# Altium PCB Webbie-V3.0.PcbDoc (part 1 of 3)
Units mil, origin at the board's own origin, x right, y up, seen from the top; angles counter-clockwise.
Board outline 3937.01 x 1574.8 mil, 2 copper layers (Top Layer, Bottom Layer), stack 62.8 mil thick; 134 components, 93 nets, 484 pads, 190 vias.
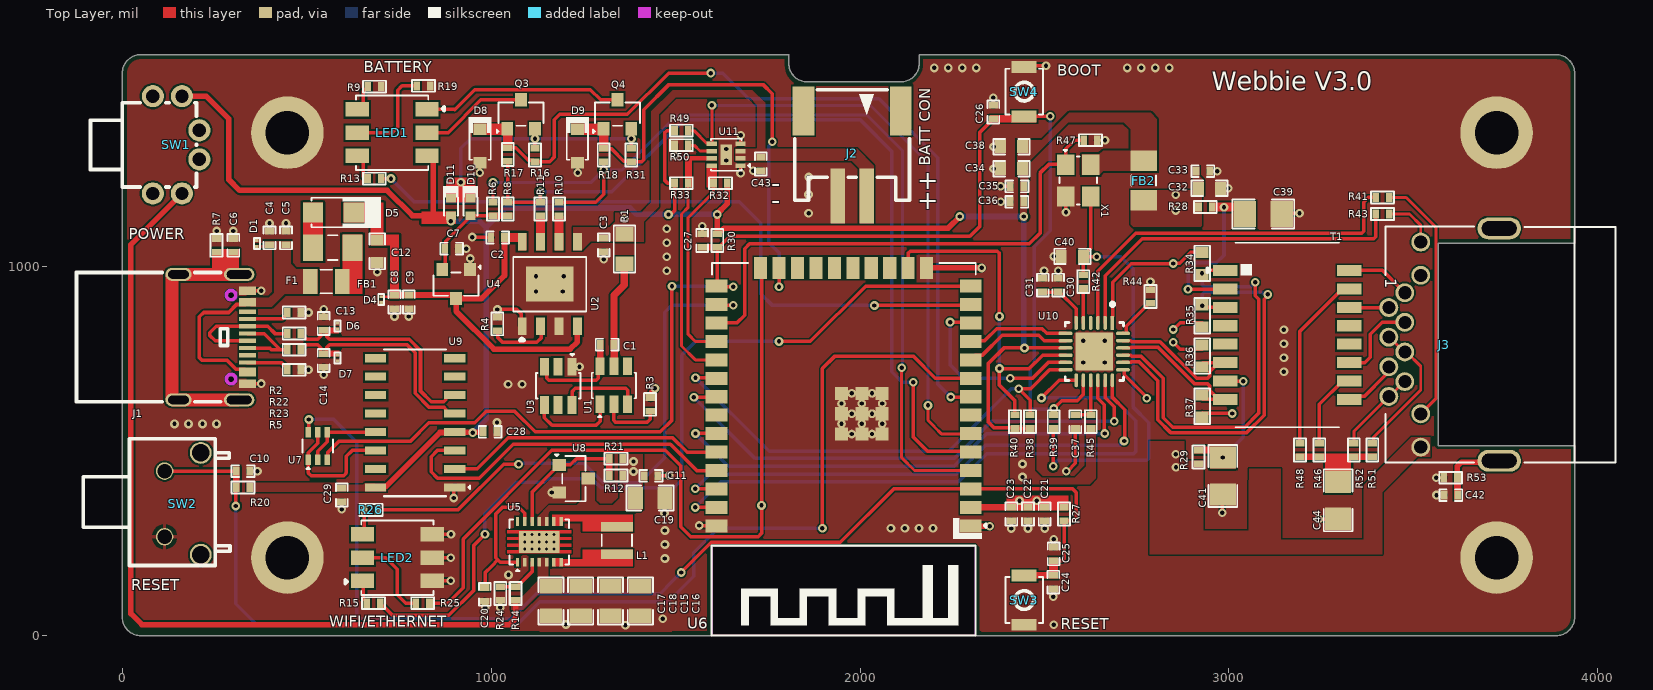
[diagram p0: Top Layer view]
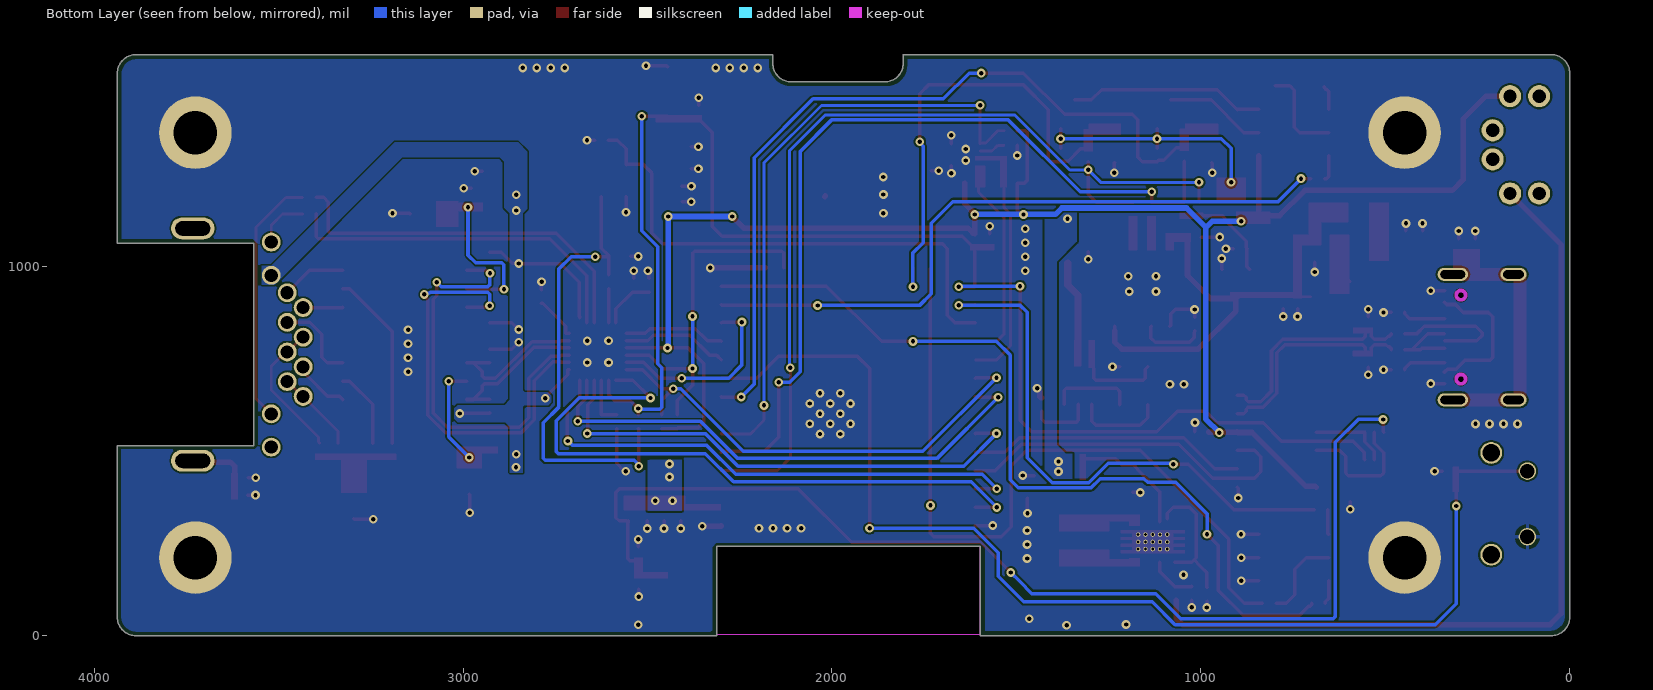
[diagram p1: Bottom Layer view, seen from below]
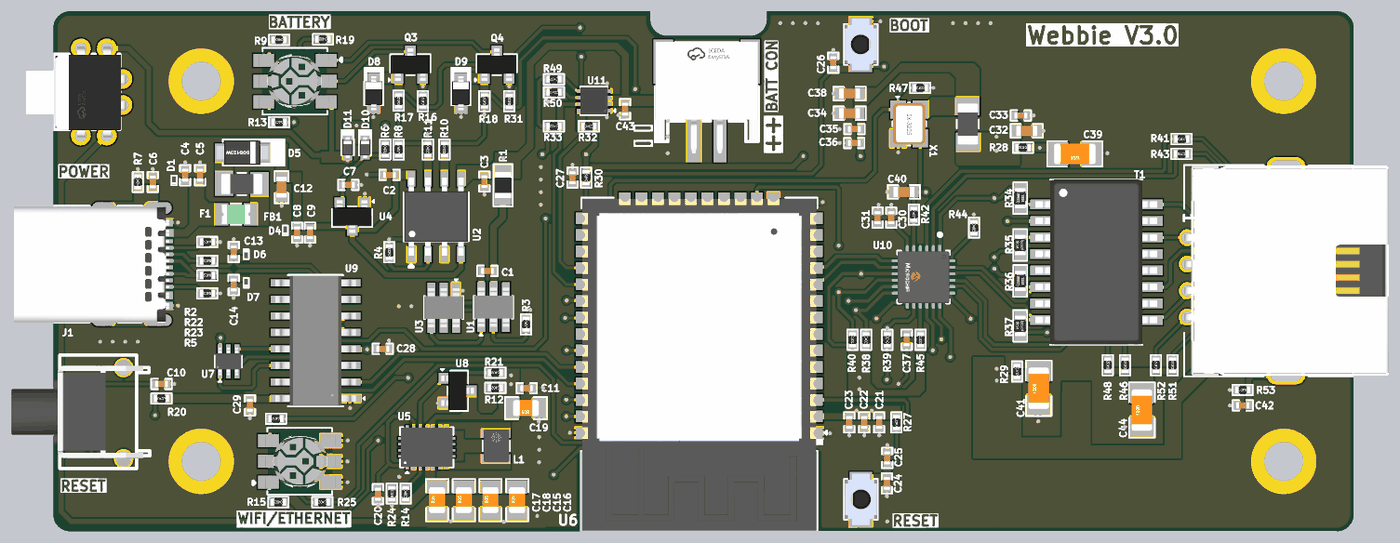
[diagram p3: 3D render of the assembled board from above, using the file's embedded part models]

## Layer stack, top to bottom
Top Solder: solder mask 0.4, Solder Resist, Dk 3.5
Top Layer: signal copper 1.4
Dielectric 1: dielectric 60, FR-4, Dk 4.8
Bottom Layer: signal copper 1.4
Bottom Solder: solder mask 0.4, Solder Resist, Dk 3.5

## Board outline
50,0 1597.76,0 1597.76,242.23 2311.67,242.23 2311.67,0.22 3887.01,0.22 3887.01,0 ccw(c3887.01,50) 3937.01,50 3937.01,514.1 3568,514.1 3568,1064 3937.01,1064 3937.01,1524.8 ccw(c3887.01,1524.8) 3887.01,1574.8 3817.37,1574.8 2160.39,1574.8 2160.39,1551 cw(c2110.39,1551) 2110.39,1501 1857.1,1501 cw(c1857.1,1551) 1807.1,1551 1807.1,1574.78 ccw(c1807.08,1574.78) 1807.08,1574.8 50,1574.8 ccw(c50,1524.8) 0,1524.8 0,50 ccw(c50,50)

## Design rules (kind name [scope] priority, off if disabled: settings)
Clearance [All] p1: gap=5 ignorepadtopadclearanceinfootprint=TRUE except(0: Arc-Text Track-Text SMDPad-Text THPad-Text Via-Text Fill-Text Poly-Text Region-Text Text-Text Text-Hole; 7: Arc-Hole Track-Hole SMDPad-Hole THPad-Hole Via-Hole)
DiffPairsRouting [All] p1: maxlimit=5 minlimit=5 mostfreqgap=5 toplayer_minwidth=9.5 toplayer_maxwidth=9.5 toplayer_prefwidth=9.5 bottomlayer_minwidth=9.5 bottomlayer_maxwidth=9.5 bottomlayer_prefwidth=9.5 maxuncoupledlength=500
HoleSize [All] p1: absolutevalues=TRUE maxlimit=500 minlimit=1 maxpercent=80.000 minpercent=20.000
HoleToHoleClearance [All] p1: gap=7 allowstackedmicrovias=TRUE
MatchedLengths "Schematic Matched Net Lengths_3" [InNetClass('EtherCAT_A')] p1: tolerance=20 checknetsindiffpair=FALSE checkdiffpairvsdiffpair=TRUE checkxsignals=TRUE checkothers=TRUE
MatchedLengths "Schematic Matched Net Lengths_2" [InNetClass('USB 90 OHM')] p2: tolerance=50 checknetsindiffpair=FALSE checkdiffpairvsdiffpair=TRUE checkxsignals=TRUE checkothers=TRUE
MaxMinImpedance "Schematic Impedance Constraint_2" [InNetClass('USB 90 OHM')] p1: minimum=85.00 maximum=95.00
MaxMinImpedance "Schematic Impedance Constraint_1" [InNetClass('EtherCAT_A')] p2: minimum=95.00 maximum=105.0
MinimumSolderMaskSliver [All] p1: minsoldermaskwidth=0
PolygonConnect [All] p1: connectstyle=Direct reliefconductorwidth=10 reliefentries=4 polygonreliefangle="90 Angle" airgapwidth=10
RoutingVias [All] p1: holewidth=11.81 width=23.62 viastyle="Through Hole" minholewidth=11.81 minwidth=23.62 maxholewidth=11.81 maxwidth=23.62
SilkToSilkClearance [All] p1: silktosilkclearance=0
SilkToSolderMaskClearance [IsPad] p1: minsilkscreentomaskgap=0 clearancetoexposedcopper=TRUE
SolderMaskExpansion [All] p1: expansion=4 istentingtop=FALSE
SupplyNets "Schematic Supply Nets_9" [InNet('+3V3')] p1: voltage=0.000
SupplyNets "Schematic Supply Nets_8" [InNet('OR_3.3V')] p2: voltage=0.000
SupplyNets "Schematic Supply Nets_7" [InNet('+3.3V_IN')] p3: voltage=0.000
SupplyNets "Schematic Supply Nets_6" [InNet('+5V_OUT')] p4: voltage=0.000
SupplyNets "Schematic Supply Nets_5" [InNet('AVDD')] p5: voltage=0.000
SupplyNets "Schematic Supply Nets_4" [InNet('B-')] p6: voltage=0.000
SupplyNets "Schematic Supply Nets_3" [InNet('OUT/BATT+')] p7: voltage=0.000
SupplyNets "Schematic Supply Nets_2" [InNet('GND')] p8: voltage=0.000
SupplyNets "Schematic Supply Nets_1" [InNet('VUSB')] p9: voltage=0.000
SupplyNets "Schematic Supply Nets" [InNet('+3.3_OUT')] p10: voltage=0.000
UnRoutedNet [All] p1: checkbadconnections=TRUE
Width [All] p1: maxlimit=50 minlimit=5 preferedwidth=10
23 further rules are at their usual default settings.

## Classes and differential pairs
differential pair class USB_Lines: USB
differential pair class "ETHERNET 100 OHM": ETH2X_RX ETH2X_TX
net class "USB 90 OHM": USB_N USB_P
net class EtherCAT_A: ETH2X_RX_N ETH2X_RX_P ETH2X_TX_N ETH2X_TX_P
component class Power_Sheet: C1 C2 C3 C4 C5 C6 C7 C8 C9 C11 C12 C13 C14 C15 C16 C17 C18 C19 C20 D1 D4 D5 D8 D9 D10 D11 F1 FB1 J1 J2 L1 LED1 LED2 Q3 Q4 R1 R2 R3 R4 R5 R6 R7 R8 R9 R10 R11 R12 R13 R14 R15 R16 R17 R18 R19 R21 R22 R23 R24 R25 R26 R31 SW1 U1 U2 U3 U4 U5 U8
component class FuelGauge_Sheet: C43 R32 R33 R49 R50 U11
component class Ethernet_Sheet: C30 C31 C32 C33 C34 C35 C36 C37 C38 C39 C40 C41 C42 C44 FB2 J3 R28 R29 R34 R35 R36 R37 R38 R39 R40 R41 R42 R43 R44 R45 R46 R47 R48 R51 R52 R53 T1 U10 X1
component class Controller_Sheet: C10 C21 C22 C23 C24 C25 C26 C27 C28 C29 D6 D7 R20 R27 R30 SW2 SW3 SW4 U6 U7 U9
differential pair USB: +USB_P -USB_N
differential pair ETH2X_TX: +ETH2X_TX_P -ETH2X_TX_N
differential pair ETH2X_RX: +ETH2X_RX_P -ETH2X_RX_N

## Components (designator, comment, footprint, x,y, rotation, side; value= is the part's Value field where it differs from the comment)
C1 "100nF" cap-0402 1314.51,788.65 r180 top
C2 "100nF" cap-0402 1017.69,1079.32 r180 top
C3 "10uF" Cap-0402 1305.3,1059.06 r90 top
C4 "10nF" Cap-0402 399,1078.5 r90 top
C5 "10nF" Cap-0402 444,1078.5 r90 top
C6 "4.7nF" Cap-0402 301,1058 r270 top
C7 "1uF" Cap-0402 893.12,1048.97 r180 top
C8 "10nF" Cap-0402 737.98,904.17 r270 top
C9 "100nF" cap-0402 776.98,904.17 r270 top
C10 "100nF" cap-0402 327.43,446 r0 top
C11 "100nF" cap-0402 1433.07,433.03 r0 top
C12 "10uF" Cap-0603 691,1042 r90 top
C13 "47pF" Cap-0402 546.01,846 r270 top
C14 "47pF" Cap-0402 546.01,746 r90 top
C15 "22uF" Cap-0805 1323.55,94 r90 top
C16 "22uF" Cap-0805 1404.32,94.01 r90 top
C17 "22uF" Cap-0805 1162,93.99 r90 top
C18 "22uF" Cap-0805 1242.77,93.99 r90 top
C19 "22uF" Cap-0805 1431,373 r180 top
C20 "100nF" cap-0402 982.77,112.09 r270 top
C21 "10nF" Cap-0402 2500.48,329.46 r90 top
C22 "100nF" cap-0402 2455.22,329.46 r90 top
C23 "100nF" cap-0402 2409.97,329.46 r90 top
C24 "100nF" cap-0402 2523.86,144.9 r270 top
C25 "100nF" cap-0402 2524.86,221.9 r270 top
C26 "100nF" cap-0402 2361.47,1419.28 r90 top
C27 "100nF" cap-0402 1572,1071 r270 top
C28 "10nF" Cap-0402 997.4,552.43 r0 top
C29 "100nF" cap-0402 595.21,381.31 r270 top
C30 "1uF" Cap-0402 2537,950 r270 top
C31 "4.7nF" Cap-0402 2495.56,950 r90 top
C32 "10uF" Cap-0603 2947.37,1212.61 r180 top
C33 "100nF" cap-0402 2929.37,1259.22 r0 top
C34 "10uF" Cap-0603 2411,1266 r0 top
C35 "100nF" cap-0402 2425.32,1218 r180 top
C36 "100nF" cap-0402 2425,1176 r180 top
C37 "100nF" cap-0402 2583.82,579.91 r90 top
C38 "10uF" Cap-0603 2411,1325.55 r0 top
C39 "1000pF" Cap-1206 3093,1143 r180 top
C40 "15pF" Cap-0603 2575.34,1027.98 r0 top
C41 "1000pF" Cap-1206 2983.5,433 r90 top
C42 "4.7nF" Cap-0402 3601.5,381 r180 top
C43 "100nF" cap-0402 1731.2,1278.62 r270 top
C44 "1000pF" Cap-1206 3296,367 r90 top
D1 "PESD5V0H1BSFYL" DSN0603-2 365.24,1062.81 r90 top
D4 "PESD5V0H1BSFYL" DSN0603-2 702,910.87 r90 top
D5 "PMEG3010ER,115" SOD-123W 572,1147 r0 top
D6 "PESD5V0H1BSFYL" DSN0603-2 583.47,839.1 r270 top
D7 "PESD5V0H1BSFYL" DSN0603-2 583.62,752.63 r90 top
D8 "MM3Z3V3" SOD-323 970,1327 r270 top
D9 "MM3Z3V3" SOD-323 1234,1327 r270 top
D10 "RB521S-30" SOD-523 943.78,1162.18 r90 top
D11 "RB521S-30" SOD-523 891,1162.18 r90 top
F1 "BSMD0805L-200" Fuse-0805 553,960 r0 top
FB1 "100MHz" IND-1206 570.62,1051.99 r180 top
FB2 "100MHz" IND-1206 2769,1233.61 r90 top
J1 "MC-121-L119" MC-121-L119 317.04,979.25 r270 top locked
J2 "S2B-PH-SM4-TB(LF)(SN)" S2B-PH-SM4-TB(LF)(SN) 1846.74,1422.32 r180 top locked
J3 "RC01835" RC01835 3583,789 r270 top locked
L1 "1uH" "IND-1008 (2520 Metric)" 1340.78,258.35 r270 top
LED1 "MHP5050RGBDT" MHP5050RGBDT 731.46,1363.31 r180 top locked
LED2 "MHP5050RGBDT" MHP5050RGBDT 745.79,211.49 r0 top
Q3 "WPM2341-3/TR" Sot-23 1081,1413 r0 top
Q4 "WPM2341-3/TR" Sot-23 1342.48,1413 r0 top
R1 "100R" RES-0805 1361.5,1048.06 r90 top
R2 "5.1K" Res-0402 465.99,876 r180 top
R3 "1K" Res-0402 1431.03,626.98 r270 top
R4 "1.2K" Res-0402 1016.94,845.24 r90 top
R5 "5.1K" Res-0402 466.01,720.5 r180 top
R6 "100K" Res-0402 1005.19,1156.49 r270 top
R7 "1M" Res-0402 256,1058 r270 top
R8 "100K" Res-0402 1045.19,1156.49 r270 top
R9 "470R" Res-0402 683.77,1488.38 r180 top
R10 "22R" Res-0402 1183.94,1156.5 r270 top
R11 "22R" Res-0402 1133.94,1156.51 r270 top
R12 "0R" Res-0402 1338.57,433.96 r180 top
R13 "470R" Res-0402 683.24,1239 r180 top
R14 "768k" Res-0402 1066.71,113.99 r270 top
R15 "470R" Res-0402 681.16,88.03 r180 top
R16 "1M" Res-0402 1118.8,1302.98 r90 top value=1MR
R17 "0R" Res-0402 1045.2,1304 r90 top
R18 "0R" Res-0402 1305.08,1302.98 r90 top
R19 "470R" Res-0402 816.41,1490.3 r180 top
R20 "10K" Res-0402 327.43,401.99 r0 top
R21 "100K" Res-0402 1338.57,479.96 r180 top
R22 "27R" Res-0402 465.99,818.92 r180 top
R23 "27R" Res-0402 465.99,774.94 r180 top
R24 "137k" Res-0402 1025,113.99 r90 top
R25 "470R" Res-0402 814.5,88 r180 top
R26 "470R" Res-0402 674.04,340.6 r180 top
R27 "10K" Res-0402 2552.73,329.46 r90 top
R28 "0R" Res-0402 2936,1162 r180 top
R29 "0R" Res-0402 2918,484 r270 top
R30 "10K" Res-0402 1613,1071 r90 top
R31 "1M" Res-0402 1380.27,1302.74 r90 top value=1MR
R32 "10K" Res-0402 1621.45,1226.78 r0 top
R33 "10K" Res-0402 1515.7,1226.78 r180 top
R34 "49.9R" Res-0603 2927.5,1008.96 r90 top
R35 "49.9R" Res-0603 2927.5,867 r270 top
R36 "49.9R" Res-0603 2927.5,758.12 r90 top
R37 "49.9R" Res-0603 2927.5,622.04 r270 top
R38 "1.5K" Res-0402 2461,579.91 r270 top
R39 "33R" Res-0402 2525,579.89 r90 top
R40 "10K" Res-0402 2419.92,579.91 r270 top
R41 "1K" Res-0402 3416.5,1188 r0 top
R42 "33R" Res-0402 2605.47,959.5 r270 top
R43 "1K" Res-0402 3416,1143 r0 top
R44 "12.1k" Res-0402 2787.7,919.62 r270 top
R45 "10K" Res-0402 2625.82,579.91 r270 top
R46 "75R" Res-0402 3245,503 r90 top
R47 "10K" Res-0402 2624.99,1343.05 r0 top
R48 "75R" Res-0402 3192.63,503 r90 top
R49 "10K" Res-0402 1515.7,1368.93 r180 top
R50 "10K" Res-0402 1515.69,1329.56 r0 top
R51 "75R" Res-0402 3388.63,503 r90 top
R52 "75R" Res-0402 3338.49,503 r90 top
R53 "1M" Res-0402 3601,428 r180 top
SW1 "TK-6580A8-1" TK-6580A8-1 83,1198.66 r270 top locked
SW2 "1-1825027-4" 1-1825027-4 212.87,357.42 r270 top locked
SW3 "B3U-1000P" B3U-1000P 2444.97,96.5 r90 top
SW4 "B3U-1000P" B3U-1000P 2444.97,1474.66 r270 top
T1 "H1102NL" H1102NLT 3158,815 r0 top locked value=350uH
U1 "DW01-A/J" SOT-23-6 1332.8,678.56 r90 top
U2 "TP4056-42-ESOP8" ESOP-8 1158.94,953.24 r90 top
U3 "8205A" SOT-23-6 1181.8,677 r270 top
U4 "MCP1700T-3302E/TT" SOT-23 904.78,953.24 r180 top
U5 "TPS63020DSJR" "14-VSON (4x3)" 1130.49,254.18 r90 top
U6 "ESP32-WROOM-32E-N4" "38-SMD Module" 1955.67,647.23 r180 top locked
U7 "UMH3N" SC-70-6_ 530,514 r90 top
U8 "APX803L20-29SR-7" SOT-23 1223.96,425.5 r270 top
U9 "CH340C" SOP-16 794,577 r180 top
U10 "LAN8720A-CP-TR" LAN8720A-CP-TR 2635,770 r270 top locked
U11 "MAX17048G+T10" "8-TDFN-EP (2x2)" 1637.2,1303.62 r180 top
X1 "50MHz" OT2EL4C4JI-111OLP-50M 2591.52,1233.61 r270 top

## Footprints (in the part's own frame and the unit in brackets; to place one, negate y for a bottom-side part, rotate by r counter-clockwise, add the part's x,y. Pads: shape width x height; smd on the part's side, far side on the other; paste and mask are expansions set on the pad)
1-1825027-4 [mm]
  round 1.2 hole 1 paste+0.135 mask+0.015: 1(-2.25,-2.49) 2(2.27,-2.49)
  round 1.5 hole 1.2 paste+0.169 mask+0.015: 3(-3.505,0) 4(3.505,0)
  silkscreen extent -4.47,-8.1 4.26,2.01, body extent -4.31,-8.64 4.1,1.51, height 7.02
"8-TDFN-EP (2x2)" [mm]
  rect 0.7x0.3 smd: 1(-0.99,0.75) 2(-0.99,0.25) 3(-0.99,-0.25) 4(-0.99,-0.75) 5(0.99,-0.75) 6(0.99,-0.25) 7(0.99,0.25) 8(0.99,0.75)
  rect 0.8x1.38 smd: 9(0,0)
  silkscreen extent -1.63,-1.1 1.05,1.1, body extent -1.05,-1.05 1.05,1.05, height 0.81
"14-VSON (4x3)" [mm]
  rect 0.6x0.24 smd: 1(-1.4,1.5) 2(-1.4,1) 3(-1.4,0.5) 4(-1.4,0) 5(-1.4,-0.5) 6(-1.4,-1) 7(-1.4,-1.5) 8(1.4,-1.5) 9(1.4,-1) 10(1.4,-0.5) 11(1.4,0) 12(1.4,0.5) 13(1.4,1) 14(1.4,1.5)
  round 0.3 hole 0.2: 15(-0.5,1) 15(-0.5,-0.5) 15(-0.5,0) 15(-0.5,0.5) 15(-0.5,-1) 15(0,1) 15(0,0.5) 15(0,0) 15(0,-0.5) 15(0,-1) 15(0.5,1) 15(0.5,-0.5) 15(0.5,0) 15(0.5,0.5) 15(0.5,-1)
  rect 1.5x2.8 smd: 15(0,0)
  Top Layer region: 0.79,-2.2 0.59,-2.2 0.59,-1.425 0.33,-1.425 0.33,-2.2 0.13,-2.2 0.13,-1.425 -0.13,-1.425 -0.13,-2.2 -0.33,-2.2 -0.33,-1.425 -0.59,-1.425 -0.59,-2.2 -0.79,-2.2 -0.79,2.2 -0.59,2.2 -0.59,1.425 -0.33,1.425 -0.33,2.2 -0.13,2.2 -0.13,1.425 0.13,1.425 0.13,2.2 0.33,2.2 0.33,1.425 0.59,1.425 0.59,2.2 0.79,2.2
  silkscreen extent -2.01,-2.06 1.55,2.06, body extent -1.5,-2 1.5,2, height 1
"38-SMD Module" [mm]
  rect 1.5x0.9 smd: 1(-8.75,8.88) 2(-8.75,7.61) 3(-8.75,6.34) 4(-8.75,5.07) 5(-8.75,3.8) 6(-8.75,2.53) 7(-8.75,1.26) 8(-8.75,-0.01) 9(-8.75,-1.28) 10(-8.75,-2.55) 11(-8.75,-3.82) 12(-8.75,-5.09) 13(-8.75,-6.36) 14(-8.75,-7.63) 25(8.75,-7.63) 26(8.75,-6.36) 27(8.75,-5.09) 28(8.75,-3.82) 29(8.75,-2.55) 30(8.75,-1.28) 31(8.75,-0.01) 32(8.75,1.26) 33(8.75,2.53) 34(8.75,3.8) 35(8.75,5.07) 36(8.75,6.34) 37(8.75,7.61) 38(8.75,8.88)
  rect 0.9x1.5 smd: 15(-5.71,-8.88) 16(-4.44,-8.88) 17(-3.17,-8.88) 18(-1.9,-8.88) 19(-0.63,-8.88) 20(0.64,-8.88) 21(1.91,-8.88) 22(3.18,-8.88) 23(4.45,-8.88) 24(5.72,-8.88)
  rect 0.9x0.9 smd: 39(-2.65,2.56) 40(-1.25,2.56) 41(0.15,2.56) 42(-2.65,1.16) 43(-1.25,1.16) 44(0.15,1.16) 45(-2.65,-0.24) 46(-1.25,-0.24) 47(0.15,-0.24)
  round 0.6 hole 0.3 mask+0: 39_10(-1.95,2.56) 39_11(-0.55,2.56) 39_12(-2.65,1.86) 39_13(-1.25,1.86) 39_14(0.15,1.86) 39_15(-1.95,1.16) 39_16(-0.55,1.16) 39_17(-2.65,0.46) 39_18(-1.25,0.46) 39_19(0.15,0.46) 39_20(-1.95,-0.24) 39_21(-0.55,-0.24)
  Keep-Out Layer region: -9.042,10.287 9.042,10.287 9.042,16.383 -9.042,16.383
  silkscreen extent -9.8,-9.22 9.09,16.43, body extent -9,-9.12 9,16.38, height 3.25
B3U-1000P [mm] "SWITCH TACTILE SPST-NO 0.05A 12V"
  rect 0.82x1.72 smd: 1(-1.7,0) 2(1.7,0)
  silkscreen extent -1.57,-1.3 1.57,1.3, body extent -2,-1.26 2,1.24, height 1.6
cap-0402 [mil]
  rect 18x25 smd mask+2.36: 1(-18.5,0) 2(18.5,0)
  silkscreen extent -31,-16 31,16, body extent -20,-10 20,10, height 19
Cap-0402 [mil]
  rect 18x25 smd mask+2.36: 1(-18.5,0) 2(18.5,0)
  silkscreen extent -31,-16 31,16, body extent -20,-10 20,10, height 19
Cap-0603 [mil]
  rect 30x35 smd mask+2.36: 1(-30,0) 2(30,0)
  silkscreen extent -49,-21 49,21, body extent -32,-16 31,16, height 34
Cap-0805 [mil] "SMD 0805"
  rect 40x60 smd mask+2.76: 1(-40,0) 2(40,0)
  silkscreen extent -64,-34 64,34, body extent -39,-25 39,25, height 30
Cap-1206 [mil] "SMD 1206"
  rect 60x70 smd: 1(-50,0) 2(50,0)
  silkscreen extent -84,-39 84,39, body extent -63,-31 63,32, height 39
DSN0603-2 [mm]
  rect 0.2x0.24 smd mask+0.055: 1(-0.2,0) 2(0.2,0)
  silkscreen extent -0.38,-0.2 0.38,0.2, body extent -0.3,-0.15 0.3,0.15, height 0.32
ESOP-8 [mm]
  rect 1.2x0.6 smd: 1(-2.909,1.905) 2(-2.909,0.635) 3(-2.909,-0.635) 4(-2.909,-1.905) 5(2.909,-1.905) 6(2.909,-0.635) 7(2.909,0.635) 8(2.909,1.905)
  rect 2.4x3.3 smd: 9(0,0)
  silkscreen extent -3.88,-2.51 1.85,2.51, body extent -3,-2.45 3,2.45, height 1.75
Fuse-0805 [mm]
  rect 1x1.7 smd: 1(-1.1,0) 2(1.1,0)
  silkscreen extent -0.41,-0.81 0.41,0.81, body extent -1.1,-0.75 1.1,0.75, height 1.24
H1102NLT [mm]
  rect 1.67x0.76 smd: 1(-4.265,4.445) 2(-4.265,3.175) 3(-4.265,1.905) 4(-4.265,0.635) 5(-4.265,-0.635) 6(-4.265,-1.905) 7(-4.265,-3.175) 8(-4.265,-4.445) 9(4.265,-4.445) 10(4.265,-3.175) 11(4.265,-1.905) 12(4.265,-0.635) 13(4.265,0.635) 14(4.265,1.905) 15(4.265,3.175) 16(4.265,4.445)
  silkscreen extent -5.48,-6.35 3.55,6.35, body extent -4.7,-6.35 4.7,6.35, height 5.97
"IND-1008 (2520 Metric)" [mm]
  rect 0.65x2.2 smd: 1(-0.95,0) 2(0.95,0)
  silkscreen extent -0.41,-1.04 0.41,1.04, body extent -1.25,-1 1.25,1, height 1.2
IND-1206 [mm]
  rect 1.4x1.82 smd: 1(-1.36,0) 2(1.36,0)
  silkscreen extent -0.34,-0.85 0.34,0.85, body extent -1.6,-0.8 1.6,0.8, height 1.3
LAN8720A-CP-TR [mm]
  rect 0.961x0.239 smd paste+0 mask+0: 1(-1.976,1.25)
  rrect100% 0.961x0.239 smd paste+0 mask+0: 2(-1.976,0.75) 3(-1.976,0.25) 4(-1.976,-0.25) 5(-1.976,-0.75) 6(-1.976,-1.25) 13(1.976,-1.25) 14(1.976,-0.75) 15(1.976,-0.25) 16(1.976,0.25) 17(1.976,0.75) 18(1.976,1.25)
  rrect100% 0.239x0.961 smd paste+0 mask+0: 7(-1.25,-1.976) 8(-0.75,-1.976) 9(-0.25,-1.976) 10(0.25,-1.976) 11(0.75,-1.976) 12(1.25,-1.976) 19(1.25,1.976) 20(0.75,1.976) 21(0.25,1.976) 22(-0.25,1.976) 23(-0.75,1.976) 24(-1.25,1.976)
  rect 2.6x2.6 smd paste-1000 mask+0: 25(0,0)
  silkscreen extent -3.38,-2 2,2, body extent -2.96,-2.96 2.96,2.96, height 0.25
MC-121-L119 [mm]
  round 0.7 hole 0.7 paste-2539.97 mask+0.015: 7(1.43,-0.559) 8(7.21,-0.56)
  oval 0.9x2.1 hole 0.6 slot 1.7 at 90 deg: 13(0,0) 13(8.64,0)
  oval 0.9x1.8 hole 0.6 slot 1.4 at 90 deg: 13(0,-4.18) 13(8.64,-4.18)
  rect 0.6x1.15 smd paste-100 mask+0.051: A1B12(1.12,0.565) A4B9(1.92,0.565) B1A12(7.52,0.565) B4A9(6.72,0.565)
  rect 0.3x1.15 smd paste-100 mask+0.051: A5(3.07,0.565) A6(4.07,0.565) A7(4.57,0.565) A8(5.57,0.565) B5(6.07,0.565) B6(5.07,0.565) B7(3.57,0.565) B8(2.57,0.565)
  Keep-Out Layer board cut-out: 7.535,-0.56 7.503,-0.419 7.413,-0.306 7.282,-0.243 7.138,-0.243 7.007,-0.306 6.917,-0.419 6.885,-0.56 6.885,-0.56 6.917,-0.701 7.007,-0.814 7.137,-0.877 7.282,-0.877 7.412,-0.814 7.503,-0.701 7.535,-0.56
  Keep-Out Layer board cut-out: 1.755,-0.56 1.723,-0.419 1.633,-0.306 1.502,-0.243 1.358,-0.243 1.227,-0.306 1.137,-0.419 1.105,-0.56 1.105,-0.56 1.137,-0.701 1.227,-0.814 1.357,-0.877 1.502,-0.877 1.632,-0.814 1.723,-0.701 1.755,-0.56
  Keep-Out Layer circle w0.005: c7.21,-0.56 r0.325
  Keep-Out Layer circle w0.254: c7.21,-0.56 r0.325
  Keep-Out Layer circle w0.005: c1.43,-0.56 r0.325
  Keep-Out Layer circle w0.254: c1.43,-0.56 r0.325
  silkscreen extent -0.13,-11.21 8.76,-0.79, body extent -0.13,-11.1 8.81,0.85, height 3.27
MHP5050RGBDT [mm]
  rect 1.6x1 smd: 1(-2.4,-1.6) 2(2.4,-1.6) 3(-2.4,0) 4(2.4,0) 5(-2.4,1.6) 6(2.4,1.6)
  silkscreen extent -3.58,-2.57 2.49,2.57, body extent -2.66,-2.5 2.74,2.5, height 1.62
OT2EL4C4JI-111OLP-50M [mm]
  rect 1.4x1.2 smd: 1(-1.1,-0.85) 2(1.1,-0.85) 3(1.1,0.85) 4(-1.1,0.85)
  silkscreen extent -2.11,-1.3 1.65,1.3, body extent -1.6,-1.25 1.6,1.25, height 0.81
RC01835 [mm]
  round 1.3 hole 0.9 paste-2539.97 mask+0.05: 1(-3.57,-2.7) 2(-2.55,-3.8) 3(-1.53,-2.7) 4(-0.51,-3.8) 5(0.51,-2.7) 6(1.53,-3.8) 7(2.55,-2.7) 8(3.57,-3.8) 9(-7.06,-1.6) 10(-4.77,-1.6) 11(4.77,-1.6) 12(7.06,-1.6)
  oval 1.5x3 hole 1 slot 2.4 at 90 deg paste-2539.97 mask+0.05: 13(-8,3.8) 14(8,3.8)
  silkscreen extent -8.13,-4.04 8.13,11.81, body extent -8.1,-4.01 8.1,11.71, height 7.12
Res-0402 [mil]
  rect 18x25 smd mask+2.17: 1(-18.5,0) 2(18.5,0)
  silkscreen extent -32,-17 32,16, body extent -23,-11 23,11, height 16
Res-0603 [mil]
  rect 30x35 smd: 1(-30,0) 2(30,0)
  silkscreen extent -48,-21 48,21, body extent -31,-17 31,17, height 18
RES-0805 [mil] "SMD 0805"
  rect 40x50 smd: 1(-40,0) 2(40,0)
  silkscreen extent -64,-29 64,29, body extent -39,-25 39,24, height 24
S2B-PH-SM4-TB(LF)(SN) [mm]
  rect 1x3.8 smd: 1(-4.35,5.85) 2(-2.35,5.85)
  rect 1.5x3.4 smd: 3(0,0) 4(-6.7,0)
  silkscreen extent -7.3,-1.45 0.6,6.15, body extent -7.3,-1.54 0.6,7.06, height 5.51
SC-70-6_ [mm]
  rect 0.73x0.38 smd: 1(-0.95,0.65) 2(-0.95,0) 3(-0.95,-0.65) 4(0.95,-0.65) 5(0.95,0) 6(0.95,0.65)
  silkscreen extent -1.57,-1.04 0.46,1.04, body extent -1.05,-1 1.05,1, height 0.92
SOD-123W [mm] "DIODE SCHOTTKY 30V 1A SOD123W"
  rect 1.4x1.4 smd: 1(-1.4,0) 2(1.4,0)
  silkscreen extent -1.5,-1.07 3.3,1.07, body extent -2,-0.95 2,0.95, height 1.1
SOD-323 [mm]
  rect 0.8x0.9 smd mask+0.055: 1(-1.15,0) 2(1.15,0)
  silkscreen extent -2.01,-0.79 0.94,0.79, body extent -1.3,-0.67 1.3,0.67, height 1.1
SOD-523 [mm] "SOD-523 Schottky Barrier Diodes (SBD) ROHS"
  rect 0.6x0.7 smd: 1(-0.6,0) 2(0.6,0)
  silkscreen extent -0.61,-0.53 1.42,0.53, body extent -0.8,-0.4 0.8,0.4, height 0.7
SOP-16 [mil]
  rect 57.55x22 smd: 1(-107.27,175) 2(-107.27,125) 3(-107.27,75) 4(-107.27,25) 5(-107.27,-25) 6(-107.27,-75) 7(-107.27,-125) 8(-107.27,-175) 9(107.27,-175) 10(107.27,-125) 11(107.27,-75) 12(107.27,-25) 13(107.27,25) 14(107.27,75) 15(107.27,125) 16(107.27,175)
  silkscreen extent -149,-199 84,199, body extent -122,-197 122,197, height 69
Sot-23 [mm] "TRANS NPN 40V 0.6A SOT23"
  rect 0.82x0.92 smd: 1(-0.95,-1) 2(0.95,-1) 3(0,1)
  silkscreen extent -1.68,-1.3 1.55,0.81, body extent -1.5,-1.25 1.5,1.25, height 1.05
SOT-23 [mm] "TRANS NPN 40V 0.6A SOT23"
  rect 0.82x0.92 smd: 1(-0.95,-1) 2(0.95,-1) 3(0,1)
  silkscreen extent -1.68,-1.3 1.55,0.81, body extent -1.5,-1.25 1.5,1.25, height 1.05
SOT-23-6 [mm]
  rect 1.22x0.62 smd: 1(-1.31,0.95) 2(-1.31,0) 3(-1.31,-0.95) 4(1.31,-0.95) 5(1.31,0) 6(1.31,0.95)
  silkscreen extent -2.18,-1.52 0.86,1.52, body extent -1.5,-1.5 1.5,1.5, height 1.47
TK-6580A8-1 [mil]
  round 60 hole 36: 1(0,0) 2(0,78.74) 3(-263.78,0) 4(-263.78,78.74) 5(-92.52,125.98) 6(-171.26,125.98)
  silkscreen extent -246,-169 -18,118, body extent -269,-167 7,139, height 229

## Part data
C1 C2 C9 C10 C11 C20 C22 C23 C24 C25 C26 C27 C29 C33 C35 C36 C37 C43: library part C1005X7R1H104KT000F, "CAP CER 0.1UF 50V X7R 0402", Dielectric=X7R, LCSC Part Number=C361198, Manufacturer=TDK, Tolerance=10%, Voltage=25V, Category="Ceramic Capacitors", ComponentLink1Description=LCSC, ComponentLink1URL=https://www.lcsc.com/product-detail/Multilayer-Ceramic-Capacitors-MLCC-SMD-SMT_TDK-C1005X7R1H104KT000F_C361198.html, Item Type=Capacitor, Manufacturer Part Number=C1005X7R1H104KT000F, RoHS=No, Supplier 1=Avnet, Supplier Part Number 1=C1005X7R1H104KT000F
C3: library part CL05A106MP5NUNC, "CAP CER 10UF 10V X5R 0402", Case Code (Imperial)=0402, Case Code (Metric)=1005, Dielectric=X5R, LCSC Part Number=C315248, Manufacturer=Samsung, Max Operating Temperature=85°C, Min Operating Temperature=-55°C, Package Quantity=1, Tolerance=20%, Voltage Rating=10V, Capacitance=10uF, Case/Package=0402, Category="Ceramic Capacitors", ComponentLink1Description=https://datasheet.ciiva.com/25721/cl05a106mp5nunc-25721584.pdf?src-supplier=Digi-Key, ComponentLink1URL=https://datasheet.ciiva.com/25721/cl05a106mp5nunc-25721584.pdf?src-supplier=Digi-Key, ComponentLink2Description=https://datasheet.ciiva.com/26838/getdatasheetpartid-745310-26838170.pdf?src-supplier=Verical, ComponentLink2URL=https://datasheet.ciiva.com/26838/getdatasheetpartid-745310-26838170.pdf?src-supplier=Verical, Construction=Flat, Contact Plating=Tin, Depth=0.5mm, Item Type=Capacitor, Lead Free="Lead Free", Length=1mm, Manufacturer Part Number=CL05A106MP5NUNC, Mount="Surface Mount", Packaging="Tape and Reel", Pricing 1="10000=0.02537 (USD)", Radiation Hardening=No, RoHS=Yes, RoHS Compliant=Yes, Series=CL, Stock 1=1729850, Supplier 1=Avnet, Supplier Part Number 1=CL05A106MP5NUNC, Termination=Wraparound, Thickness=0.028inch, Width=0.02inch
C4 C5 C8 C21 C28: library part CC0402KRX7R8BB103, "CAP CER 10000PF 25V X7R 0402", Case Code (Imperial)=0402, Case Code (Metric)=1005, Dielectric=X7R, LCSC Part Number=C327025, Manufacturer=Yageo, Max Operating Temperature=125°C, Min Operating Temperature=-55°C, Package Quantity=1, Supplier Part Number 1=311-1337-1-ND, Tolerance=10%, Voltage Rating=25V, Capacitance=10nF, Case/Package=0402, ComponentLink1Description=http://www.yageo.com/documents/recent/UPY-GPHC_X7R_6.3V-to-50V_18.pdf?src-supplier=Digi-Key, ComponentLink1URL=http://www.yageo.com/documents/recent/UPY-GPHC_X7R_6.3V-to-50V_18.pdf?src-supplier=Digi-Key, ComponentLink2Description=https://www.verical.com/server-webapp/html/getDatasheet?partID=375418&src-supplier=Verical, ComponentLink2URL=https://www.verical.com/server-webapp/html/getDatasheet?partID=375418&src-supplier=Verical, ComponentLink3Description=http://www.yageo.com/documents/recent/UPY-GPHC_X7R_6.3V-to-50V_8.pdf?src-supplier=Avnet, ComponentLink3URL=http://www.yageo.com/documents/recent/UPY-GPHC_X7R_6.3V-to-50V_8.pdf?src-supplier=Avnet, ComponentLink4Description=https://4donline.ihs.com/images/VipMasterIC/IC/YAGO/YAGO-S-A0003557223/YAGO-S-A0003557223-1.pdf?hkey=52A5661711E402568146F3353EA87419&src-supplier=Element14, ComponentLink4URL=https://4donline.ihs.com/images/VipMasterIC/IC/YAGO/YAGO-S-A0003557223/YAGO-S-A0003557223-1.pdf?hkey=52A5661711E402568146F3353EA87419&src-supplier=Element14, ComponentLink5Description=http://www.farnell.com/datasheets/2167236.pdf?src-supplier=Element14, ComponentLink5URL=http://www.farnell.com/datasheets/2167236.pdf?src-supplier=Element14, ComponentLink6Description=http://www.mouser.com/ds/2/447/Yageo_UPY-GP_NP0_16V-to-50V_9-358835.pdf?src-supplier=Mouser, ComponentLink6URL=http://www.mouser.com/ds/2/447/Yageo_UPY-GP_NP0_16V-to-50V_9-358835.pdf?src-supplier=Mouser, Composition=Ceramic, Depth=0.5mm, Halogen Free="Halogen Free", Height=0.5mm, Item Type=Capacitor, Lead Free="Lead Free", Length=1mm, Manufacturer Part Number=CC0402KRX7R8BB103, Mount="Surface Mount", Packaging="Tape and Reel", Pricing 1="1=0.1, 10=0.021, 100=0.0093, 500=0.00666, 1000=0.00523, 2500=0.00476, 5000=0.00438 (USD)", Radiation Hardening=No, REACH SVHC=Unknown, Stock 1=0, Supplier 1=Digi-Key, Termination=SMD/SMT, Thickness=0.022inch, Voltage Rating (DC)=25V, Width=0.02inch
C6 C31 C42: library part CC0402KRX7R9BB472, "CAP CER 4700PF 50V X7R 0402", Case Code (Imperial)=0402, Case Code (Metric)=1005, Dielectric=X7R, LCSC Part Number=C106208, Manufacturer=Yageo, Max Operating Temperature=125°C, Min Operating Temperature=-55°C, Package Quantity=1, Supplier Part Number 1=1989300, Temperature Coefficient=30ppm/°C, Tolerance=10%, Voltage Rating=50V, Capacitance=4.7nF, Case/Package=0402, Category="Ceramic Capacitors", ComponentLink1Description=https://datasheet.ciiva.com/7978/1489800-7978108.pdf?src-supplier=Element14, ComponentLink1URL=https://datasheet.ciiva.com/7978/1489800-7978108.pdf?src-supplier=Element14, ComponentLink2Description=https://datasheet.ciiva.com/176/mlccorderingcode-176364.pdf?src-supplier=Digikey, ComponentLink2URL=https://datasheet.ciiva.com/176/mlccorderingcode-176364.pdf?src-supplier=Digikey, ComponentLink3Description=https://datasheet.ciiva.com/176/mlccorderingcode-176363.pdf?src-supplier=Digikey, ComponentLink3URL=https://datasheet.ciiva.com/176/mlccorderingcode-176363.pdf?src-supplier=Digikey, ComponentLink4Description=https://datasheet.ciiva.com/176/mlccorderingcode-176365.pdf?src-supplier=Digikey, ComponentLink4URL=https://datasheet.ciiva.com/176/mlccorderingcode-176365.pdf?src-supplier=Digikey, ComponentLink5Description=https://datasheet.ciiva.com/11586/upy-gphc-x7r-6-3v-to-50v-8-11586491.pdf?src-supplier=Avnet, ComponentLink5URL=https://datasheet.ciiva.com/11586/upy-gphc-x7r-6-3v-to-50v-8-11586491.pdf?src-supplier=Avnet, Construction=Flat, Depth=0.5mm, Halogen Free=5694HalogenFree, Height=0.5mm, Item Type=Capacitor, Lead Free=5697LeadFree, Length=1mm, Manufacturer Part Number=CC0402KRX7R9BB472, Material=4241ConductorMaterial, Mount="Surface Mount", Number of Pins=2NUMBER, Packaging="Tape and Reel", Pricing 1="10000=0.0021, 40000=0.002, 150000=0.0019, 400000=0.0018, 1000000=0.0017 (USD)", Radiation Hardening=No, Reach SVHC Compliant=No, RoHS=Yes, RoHS Compliant=Yes, Series=CC, Stock 1=1780000, Supplier 1="Future Electronics", Termination=SMD/SMT, Thickness=0.022inch, Voltage Rating (DC)=50V, Width=0.02inch
C7: library part CC0402KRX5R6BB105, "CAP CER 1UF 10V X5R 0402", Case Code (Imperial)=0402, Case Code (Metric)=1005, Dielectric=X5R, LCSC Part Number=C106254, Manufacturer=Yageo, Max Operating Temperature=85°C, Min Operating Temperature=-55°C, Package Quantity=1, Resistor Type=Ceramic, Supplier Part Number 1=603-CC402KRX5R6BB105, Tolerance=10%, Voltage Rating=10V, Capacitance=1uF, Case/Package=0402, Category="Ceramic Capacitors", ComponentLink1Description=https://datasheet.ciiva.com/176/upy-gphc-x5r-4v-to-50v-12-176704.pdf?src-supplier=Digi-Key, ComponentLink1URL=https://datasheet.ciiva.com/176/upy-gphc-x5r-4v-to-50v-12-176704.pdf?src-supplier=Digi-Key, ComponentLink2Description=https://datasheet.ciiva.com/176/mlccorderingcode-176705.pdf?src-supplier=Digi-Key, ComponentLink2URL=https://datasheet.ciiva.com/176/mlccorderingcode-176705.pdf?src-supplier=Digi-Key, ComponentLink3Description=https://datasheet.ciiva.com/176/mlccorderingcode-176706.pdf?src-supplier=Digi-Key, ComponentLink3URL=https://datasheet.ciiva.com/176/mlccorderingcode-176706.pdf?src-supplier=Digi-Key, Construction=Flat, Depth=0.5mm, Dissipation Factor=15%, Halogen Free="Halogen Free", Height=0.5mm, Item Type=Capacitor, Lead Free="Lead Free", Length=1mm, Manufacturer Part Number=CC0402KRX5R6BB105, Mount="Surface Mount", Number of Pins=2, Packaging="Tape and Reel", Pricing 1="1=0.11000, 10=0.05500, 50=0.05500, 100=0.03300, 500=0.02700, 1000=0.02200, 2500=0.02100, 10000=0.01800 (USD)", Radiation Hardening=No, REACH SVHC="No SVHC", RoHS=Yes, RoHS Compliant=Yes, Series=CC, Stock 1=6711367, Supplier 1=Mouser, Termination=SMD/SMT, Thickness=0.022inch, Voltage Rating (DC)=10V, Width=0.02inch
C12 C32 C34 C38: library part CL10A106MA8NRNC, "CAP CER 10UF 25V X5R 0603", Case Code (Imperial)=0603, Case Code (Metric)=1608, Dielectric=X5R, LCSC Part Number=C96446, Manufacturer=Samsung, Max Operating Temperature=85°C, Min Operating Temperature=-55°C, Package Quantity=1, Tolerance=20%, Voltage Rating=25V, Capacitance=10uF, Case/Package=0603, Category="Ceramic Capacitors", ComponentLink1Description=https://datasheet.ciiva.com/25766/cl10a106ma8nrnc-25766562.pdf?src-supplier=Digi-Key, ComponentLink1URL=https://datasheet.ciiva.com/25766/cl10a106ma8nrnc-25766562.pdf?src-supplier=Digi-Key, Construction=Flat, Contact Plating=Tin, Lead Free="Lead Free", Length=0.063inch, Manufacturer Part Number=CL10A106MA8NRNC, Mount="Surface Mount", Packaging="Tape and Reel", Pricing 1="4000=0.03753, 8000=0.03700, 16000=0.03595, 24000=0.03515, 32000=0.03383, 40000=0.03304, 400000=0.03225 (USD)", RoHS=Yes, RoHS Compliant=Yes, Series=CL, Supplier 1=Avnet, Supplier Part Number 1=CL10A106MA8NRNC, Termination=Wraparound, Thickness=0.035inch, Width=0.031inch
C13 C14: library part GCM1555C1H470FA16D, "CAP CER 47PF 50V C0G/NP0 0402", Case Code (Imperial)=0402, Case Code (Metric)=1005, LCSC Part Number=C393684, Manufacturer=Murata, Max Operating Temperature=125°C, Min Operating Temperature=-55°C, Ratings=AEC-Q200, Supplier Part Number 1=490-16445-1-ND, Tolerance=1%, Voltage Rating=50V, Capacitance=47pF, Case/Package=0402, Category="Ceramic Capacitors", ComponentLink1Description=http://search.murata.co.jp/Ceramy/image/img/A01X/G101/ENG/GCM1555C1H470FA16-01.pdf?src-supplier=Digi-Key, ComponentLink1URL=http://search.murata.co.jp/Ceramy/image/img/A01X/G101/ENG/GCM1555C1H470FA16-01.pdf?src-supplier=Digi-Key, Manufacturer Part Number=GCM1555C1H470FA16D, Mount="Surface Mount", Packaging="Tape and Reel", Pricing 1="1=0.11000, 10=0.07900, 50=0.04500, 100=0.03730, 500=0.02618, 1000=0.02168, 2500=0.02018, 5000=0.01846 (USD)", RoHS=No, Stock 1=27098, Supplier 1=Digi-Key
C15 C16 C17 C18 C19: library part C2012X5R1V226MT000E, "CAP CER 22UF 35V X5R 0805", LCSC Part Number=C338080, Manufacturer="TDK Corporation", Package=0805, ComponentLink1Description=LCSC, ComponentLink1URL=https://www.lcsc.com/product-detail/Multilayer-Ceramic-Capacitors-MLCC-SMD-SMT_TDK-C2012X5R1V226M125AC_C2179409.html, Item Type=Capacitor, Manufacturer Part Number=C2012X5R1V226MT000E
C30: library part CC0402KRX5R7BB105, "CAP CER 1UF 16V X5R 0402", Case Code (Imperial)=0402, Case Code (Metric)=1005, Dielectric=X5R, LCSC Part Number=C325464, Manufacturer=Yageo, Max Operating Temperature=85°C, Min Operating Temperature=-55°C, Supplier Part Number 1=311-1691-6-ND, Tolerance=10%, Voltage Rating=16V, Capacitance=1uF, Case/Package=0402, ComponentLink1Description=http://www.yageo.com/documents/recent/UPY-GPHC_X5R_4V-to-50V_12.pdf?src-supplier=Avnet+Europe, ComponentLink1URL=http://www.yageo.com/documents/recent/UPY-GPHC_X5R_4V-to-50V_12.pdf?src-supplier=Avnet+Europe, Composition=Ceramic, Depth=0.5mm, Halogen Free="Halogen Free", Height=0.5mm, Item Type=Capacitor, Lead Free="Lead Free", Length=1mm, Manufacturer Part Number=CC0402KRX5R7BB105, Mount="Surface Mount", Packaging="Tape and Reel", Pricing 1="1=0.36, 10=0.252, 100=0.1512, 500=0.1134, 1000=0.09576, 2500=0.09072, 5000=0.08568 (USD)", Radiation Hardening=No, Stock 1=1405667, Supplier 1=Digi-Key, Termination=SMD/SMT, Thickness=0.022inch, Voltage Rating (DC)=16V, Weight=2.3E-05oz, Width=0.02inch
C39 C41 C44: library part CC1206KKX7RDBB102, "CAP CER 1000PF 2KV X7R 1206", Capacitance=1nF, Case Code (Imperial)=1206, Case Code (Metric)=3216, Dielectric=X7R, Insulation Resistance=10GR, LCSC Part Number=C23631, Manufacturer=Yageo, Max Operating Temperature=125°C, Min Operating Temperature=-55°C, Package Quantity=1, Resistor Type=Ceramic, Supplier Part Number 1=311-1487-1-ND, Tolerance=10%, Voltage=2kV, Case/Package=1206, Category="Ceramic Capacitors", ComponentLink1Description=https://datasheet.ciiva.com/23942/1449957-23942422.pdf?src-supplier=Newark, ComponentLink1URL=https://datasheet.ciiva.com/23942/1449957-23942422.pdf?src-supplier=Newark, ComponentLink2Description=https://datasheet.ciiva.com/186/upy-np0x7r-hv-1kv-to-3kv-4-186736.pdf?src-supplier=Digi-Key, ComponentLink2URL=https://datasheet.ciiva.com/186/upy-np0x7r-hv-1kv-to-3kv-4-186736.pdf?src-supplier=Digi-Key, ComponentLink3Description=https://datasheet.ciiva.com/186/upy-np0x7r-hv-1kv-to-3kv-4-186737.pdf?src-supplier=Digi-Key, ComponentLink3URL=https://datasheet.ciiva.com/186/upy-np0x7r-hv-1kv-to-3kv-4-186737.pdf?src-supplier=Digi-Key, ComponentLink4Description=https://datasheet.ciiva.com/13386/upy-gp-np0-16v-to-50v-8-13386312.pdf?src-supplier=Mouser, ComponentLink4URL=https://datasheet.ciiva.com/13386/upy-gp-np0-16v-to-50v-8-13386312.pdf?src-supplier=Mouser, ComponentLink5Description=https://datasheet.ciiva.com/186/upy-np0x7r-hv-1kv-to-3kv-4-186735.pdf?src-supplier=Digi-Key, ComponentLink5URL=https://datasheet.ciiva.com/186/upy-np0x7r-hv-1kv-to-3kv-4-186735.pdf?src-supplier=Digi-Key, Construction=Flat, Depth=1.6mm, Dissipation Factor=2.5%, Height=1.25mm, Item Type=Capacitor, Lead Free="Lead Free", Length=3.2mm, Manufacturer Part Number=CC1206KKX7RDBB102, Mount="Surface Mount", Number of Pins=2, Packaging="Tape and Reel", Pricing 1="1=0.35000, 10=0.24000, 50=0.16780, 100=0.14390, 500=0.10794, 1000=0.09114 (USD)", Radiation Hardening=No, REACH SVHC=Unknown, RoHS=Yes, RoHS Compliant=Yes, Series=CC, Stock 1=19260, Supplier 1=Digi-Key, Termination=SMD/SMT, Thickness=0.057inch, Voltage Rating=2kV, Voltage Rating (DC)=2kV, Width=0.063inch
C40: library part CC0603JRNPO9BN150, "CAP CER 15PF 50V C0G/NPO 0603", Case Code (Imperial)=0603, Case Code (Metric)=1608, Dielectric=C0G, Dielectric Material=Ceramic, Insulation Resistance=100GR, LCSC Part Number=C107037, Manufacturer=Yageo, Max Operating Temperature=125°C, Min Operating Temperature=-55°C, Package Quantity=1, Supplier Part Number 1=4234670, Tolerance=5%, Voltage Rating=50V, Case/Package=0603, Category="Ceramic Capacitors", ComponentLink1Description=https://datasheet.ciiva.com/144/mlccorderingcode-144635.pdf?src-supplier=Digi-Key, ComponentLink1URL=https://datasheet.ciiva.com/144/mlccorderingcode-144635.pdf?src-supplier=Digi-Key, ComponentLink2Description=https://datasheet.ciiva.com/144/mlccorderingcode-144636.pdf?src-supplier=Digi-Key, ComponentLink2URL=https://datasheet.ciiva.com/144/mlccorderingcode-144636.pdf?src-supplier=Digi-Key, ComponentLink3Description=https://datasheet.ciiva.com/8033/1443161-8033721.pdf?src-supplier=Element14, ComponentLink3URL=https://datasheet.ciiva.com/8033/1443161-8033721.pdf?src-supplier=Element14, ComponentLink4Description=https://datasheet.ciiva.com/28450/1443161-28450472.pdf?src-supplier=Element14, ComponentLink4URL=https://datasheet.ciiva.com/28450/1443161-28450472.pdf?src-supplier=Element14, ComponentLink5Description=https://datasheet.ciiva.com/144/mlccorderingcode-144634.pdf?src-supplier=Digi-Key, ComponentLink5URL=https://datasheet.ciiva.com/144/mlccorderingcode-144634.pdf?src-supplier=Digi-Key, ComponentLink6Description=https://datasheet.ciiva.com/8033/1734582-8033723.pdf?src-supplier=Element14, ComponentLink6URL=https://datasheet.ciiva.com/8033/1734582-8033723.pdf?src-supplier=Element14, ComponentLink7Description=https://datasheet.ciiva.com/8033/1734582-8033722.pdf?src-supplier=Element14, ComponentLink7URL=https://datasheet.ciiva.com/8033/1734582-8033722.pdf?src-supplier=Element14, ComponentLink8Description=https://datasheet.ciiva.com/11464/upy-gp-np0-16v-to-50v-8-11464727.pdf?src-supplier=Avnet, ComponentLink8URL=https://datasheet.ciiva.com/11464/upy-gp-np0-16v-to-50v-8-11464727.pdf?src-supplier=Avnet, Depth=0.8mm, Height=0.8mm, Item Type=Capacitor, Lead Free="Lead Free", Length=1.6mm, Manufacturer Part Number=CC0603JRNPO9BN150, Mounting Technology="Surface Mount", Packaging="Tape and Reel", Pins=2, Pricing 1="4000=0.0038, 16000=0.0036, 80000=0.0034, 160000=0.0033, 500000=0.0031 (USD)", Radiation Hardening=No, Reach SVHC Compliant=No, RoHS=Yes, RoHS Compliant=Yes, Series=CC, Stock 1=832000, Supplier 1="Future Electronics", Termination=SMD/SMT, Thickness=0.035inch, Width=0.031inch
D1 D4 D6 D7: "TVS DIODE 5VWM 6.3VC DSN0603-2", LCSC Part Number=C477989, Manufacturer=Nexperia, Category="ESD and Circuit Protection ICs", ComponentLink1Description=http://www.farnell.com/datasheets/1961312.pdf?src-supplier=Farnell, ComponentLink1URL=http://www.farnell.com/datasheets/1961312.pdf?src-supplier=Farnell, ComponentLink2Description=https://assets.nexperia.com/documents/data-sheet/PESD5V0H1BSF.pdf?src-supplier=Digi-Key, ComponentLink2URL=https://assets.nexperia.com/documents/data-sheet/PESD5V0H1BSF.pdf?src-supplier=Digi-Key, ComponentLink3Description=http://www.farnell.com/datasheets/1961312.pdf?src-supplier=Newark, ComponentLink3URL=http://www.farnell.com/datasheets/1961312.pdf?src-supplier=Newark, Item Type=Diode, Manufacturer Part Number=PESD5V0H1BSFYL, Pricing 1="18000=0.06453, 36000=0.06278, 54000=0.06104, 90000=0.05930, 180000=0.05755, 900000=0.05581, 1800000=0.05406 (USD)", RoHS=Yes, RoHS Compliant=Yes, Stock 1=9000, Supplier 1=Avnet, Supplier Part Number 1=PESD5V0H1BSFYL
D5: "DIODE SCHOTTKY 30V 1A SOD123W", LCSC Part Number=C456106, Manufacturer=Nexperia, Supplier Part Number 1=1727-5201-1-ND, Manufacturer Part Number=PMEG3010ER,115, Pricing 1="1=0.35, 10=0.282, 25=0.258, 100=0.162, 250=0.1602, 500=0.15, 1000=0.102 (USD)", Stock 1=72983, Supplier 1=Digi-Key
D8 D9: "±5% Single 3.1V~3.5V 300mW 3.3V SOD-323 Zener Diodes ROHS", LCSC Part Number=C123917, Manufacturer=JSMSEMI, Package=SOD-323, ComponentLink1Description=LCSC, ComponentLink1URL=https://www.lcsc.com/product-detail/Zener-Diodes_Shandong-Jingdao-Microelectronics-MM3Z3V3_C123917.html, Item Type=Diode, Manufacturer Part Number=MM3Z3V3
D10 D11: "30V 500mV@200mA 200mA SOD-523 Schottky Barrier Diodes (SBD) ROHS", LCSC Part Number=C8523, Manufacturer="Jiangsu Changjing Electronics", Package=SOD-523, ComponentLink1Description=LCSC, ComponentLink1URL=https://www.lcsc.com/product-detail/Schottky-Barrier-Diodes-SBD_Jiangsu-Changjing-Electronics-Technology-Co-Ltd-RB521S-30_C8523.html, Item Type=Diode, Manufacturer Part Number=RB521S-30
F1: "6V 2A 50A 1W -40℃~+85℃ 4A 4mΩ 5s 45mΩ 0805 Resettable Fuses ROHS", LCSC Part Number=C2757931, Manufacturer=BHFUSE, Package=0805, ComponentLink1Description=LCSC, ComponentLink1URL=https://www.lcsc.com/product-detail/Resettable-Fuses_BHFUSE-BSMD0805L-200_C2757931.html, Item Type=Fuse, Manufacturer Part Number=BSMD0805L-200
FB1 FB2: library part BLM31PG121SN1L, "FERRITE BEAD 120 OHM 1206 1LN", Case Code (Imperial)=1206, Case Code (Metric)=3216, Current Rating=3.5A, DC Current=3A, DC Resistance (DCR)=20mR, LCSC Part Number=C85841, Manufacturer=Murata, Max Operating Temperature=125°C, Min Operating Temperature=-55°C, Package Quantity=3000, Tolerance=25%, Case/Package=1206, Category="Ferrite Beads and Chips", ComponentLink1Description=https://datasheet.ciiva.com/19460/1845419-19460234.pdf?src-supplier=Jameco, ComponentLink1URL=https://datasheet.ciiva.com/19460/1845419-19460234.pdf?src-supplier=Jameco, ComponentLink2Description=https://datasheet.ciiva.com/1012/l0132s0193blm31p-1012992.pdf?src-supplier=Digi-Key, ComponentLink2URL=https://datasheet.ciiva.com/1012/l0132s0193blm31p-1012992.pdf?src-supplier=Digi-Key, ComponentLink3Description=https://datasheet.ciiva.com/11799/0900766b811b5866-11799444.pdf?src-supplier=RSComponents, ComponentLink3URL=https://datasheet.ciiva.com/11799/0900766b811b5866-11799444.pdf?src-supplier=RSComponents, ComponentLink4Description=https://datasheet.ciiva.com/3081/l0110s0100blm31p-3081665.pdf?src-supplier=Avnet, ComponentLink4URL=https://datasheet.ciiva.com/3081/l0110s0100blm31p-3081665.pdf?src-supplier=Avnet, ComponentLink5Description=https://datasheet.ciiva.com/41449/001172383-da-01-en-drossel-1206-120r-3-2x1-60mm-3000st-41449554.pdf?src-supplier=Conrad, ComponentLink5URL=https://datasheet.ciiva.com/41449/001172383-da-01-en-drossel-1206-120r-3-2x1-60mm-3000st-41449554.pdf?src-supplier=Conrad, ComponentLink6Description=https://datasheet.ciiva.com/29348/442557-da-01-en-chip-drossel-1206-120r-3000ma-3-2x1-60mm-29348014.pdf?src-supplier=Conrad, ComponentLink6URL=https://datasheet.ciiva.com/29348/442557-da-01-en-chip-drossel-1206-120r-3000ma-3-2x1-60mm-29348014.pdf?src-supplier=Conrad, ComponentLink7Description=https://datasheet.ciiva.com/14122/apblm31p-data-e-14122856.pdf?src-supplier=Distrelec, ComponentLink7URL=https://datasheet.ciiva.com/14122/apblm31p-data-e-14122856.pdf?src-supplier=Distrelec, ComponentLink8Description=https://datasheet.ciiva.com/48436/blm31pg121sn1l-eng-tds-48436731.pdf?src-supplier=Distrelec, ComponentLink8URL=https://datasheet.ciiva.com/48436/blm31pg121sn1l-eng-tds-48436731.pdf?src-supplier=Distrelec, ComponentLink9Description=https://datasheet.ciiva.com/1012/l0110s0100blm31p-1012991.pdf?src-supplier=Digi-Key, ComponentLink9URL=https://datasheet.ciiva.com/1012/l0110s0100blm31p-1012991.pdf?src-supplier=Digi-Key, ComponentLink10Description=https://datasheet.ciiva.com/1012/l0110s0100blm31p-1012993.pdf?src-supplier=Digi-Key, ComponentLink10URL=https://datasheet.ciiva.com/1012/l0110s0100blm31p-1012993.pdf?src-supplier=Digi-Key, ComponentLink11Description=https://datasheet.ciiva.com/3081/l0110s0100blm31p-3081666.pdf?src-supplier=Avnet, ComponentLink11URL=https://datasheet.ciiva.com/3081/l0110s0100blm31p-3081666.pdf?src-supplier=Avnet, ComponentLink12Description=https://datasheet.ciiva.com/16390/l0110s0100blm31p-16390857.pdf?src-supplier=Future+Electronics, ComponentLink12URL=https://datasheet.ciiva.com/16390/l0110s0100blm31p-16390857.pdf?src-supplier=Future+Electronics, ComponentLink13Description=https://datasheet.ciiva.com/18093/getdatasheetpartid-152966-18093084.pdf?src-supplier=Verical, ComponentLink13URL=https://datasheet.ciiva.com/18093/getdatasheetpartid-152966-18093084.pdf?src-supplier=Verical, Contact Plating=Tin,Matte, Core Material=Ferrite, Depth=1.6mm, Frequency=100MHz, Height=1.1mm, Impedance=120R, Item Type="Ferrite Bead", Lead Free="Lead Free", Length=3.2mm, Manufacturer Part Number=BLM31PG121SN1L, Material=Steel,Ferrite, Max Current Rating=3.5A, Max DC Current=3A, Military Standard=Not, Number of Lines=1, Number of Pins=2, Packaging="Tape and Reel", Pricing 1="3000=0.11563, 6000=0.10938, 12000=0.10313, 18000=0.09688, 24000=0.09063, 30000=0.08438, 300000=0.07813 (USD)", Radiation Hardening=No, RoHS=Yes, RoHS Compliant=Yes, Shielding=Unshielded, Stock 1=290640, Supplier 1=Avnet, Supplier Part Number 1=BLM31PG121SN1L, Termination=SMD/SMT, Test Frequency=100MHz, Width=1.6mm
J1: "5A USB 3.1 1 Surface Mount 16P Female -40℃~+85℃ Type-C SMD USB Connectors ROHS", LCSC Part Number=C6332278, Manufacturer="Hanbo Electronic", Package=SMD, ComponentLink1Description="LCSC Link", ComponentLink1URL=https://www.lcsc.com/product-detail/USB-Connectors_Hanbo-Electronic-MC-121-L119_C6332278.html?s_z=n_USB, Item Type=SMD, Manufacturer Part Number=MC-121-L119
J2: "1x2P 2P PH Tin 2 -25℃~+85℃ 2A 1 2mm Copper alloy Horizontal attachment SMD,P=2mm,Surface Mount，Right Angle Wire To Board Connector ROHS", LCSC Part Number=C295747, Manufacturer=JST, Package=SMD, ComponentLink1Description="LCSC Link", ComponentLink1URL=https://www.lcsc.com/product-detail/Wire-To-Board-Connector_JST-S2B-PH-SM4-TB-LF-SN_C295747.html, Item Type="JST Connector", Manufacturer Part Number=S2B-PH-SM4-TB(LF)(SN)
J3: "RJ45 RJReceptacle 1 有屏蔽 Sink board WithLED -40℃~+70℃ Plugin Ethernet Connectors/Modular Connectors (RJ45 RJ11) ROHS", LCSC Part Number=C708648, Manufacturer=RCH, Package=Plugin, ComponentLink1Description=LCSC, ComponentLink1URL=https://www.lcsc.com/product-detail/Ethernet-Connectors-Modular-Connectors-RJ45-RJ11_RCH-RC01835_C708648.html, Item Type=Ethernet, Manufacturer Part Number=RC01835
L1: library part DFE252012P-1R0M=P2, "FIXED IND 1UH 3.2A 0.042OHM SMD", Case Code (Imperial)=1008, Case Code (Metric)=2520, Current Rating=4.3A, DC Resistance (DCR)=42mR, Inductance Tolerance=20%, LCSC Part Number=C882955, Manufacturer=Murata, Manufacturer Part Number=DFE252012P-1R0M=P2, Max DC Current=3.2A, Max Operating Temperature=125°C, Min Operating Temperature=-40°C, Test Frequency=1MHz, Case/Package=1008, ComponentLink1Description=http://www.farnell.com/datasheets/2550134.pdf?src-supplier=Farnell, ComponentLink1URL=http://www.farnell.com/datasheets/2550134.pdf?src-supplier=Farnell, ComponentLink2Description=https://www.murata.com/~/media/webrenewal/products/inductor/chip/tokoproducts/wirewoundmetalalloychiptype/m_dfe252012p.ashx?src-supplier=Digikey, ComponentLink2URL=https://www.murata.com/~/media/webrenewal/products/inductor/chip/tokoproducts/wirewoundmetalalloychiptype/m_dfe252012p.ashx?src-supplier=Digikey, ComponentLink3Description=http://www.murata.com/~/media/webrenewal/products/inductor/chip/tokoproducts/wirewoundmetalalloychiptype/m_dfe252012p.ashx?src-supplier=Digikey, ComponentLink3URL=http://www.murata.com/~/media/webrenewal/products/inductor/chip/tokoproducts/wirewoundmetalalloychiptype/m_dfe252012p.ashx?src-supplier=Digikey, ComponentLink4Description=http://www.toko.co.jp/products/pdf/inductors/dfe252012p.pdf?src-supplier=Avnet, ComponentLink4URL=http://www.toko.co.jp/products/pdf/inductors/dfe252012p.pdf?src-supplier=Avnet, Core Material=Ferrite, Depth=2mm, ESR=42mR, Height=1.2mm, Height - Seated (Max)=0.039inch, Item Type=Inductor, Length=0.098inch, Mounting Technology="Surface Mount", Packaging="Cut Tape", Pricing="3000=0.103, 6000=0.1, 9000=0.0987, 12000=0.0976, 15000=0.0942 (USD)", RMS Current (Irms)=3.2A, RoHS=Yes, RoHS Compliant=Yes, Saturation Current=4.3A, Series=DFE252012P, Shielding=Shielded, Stock=30000, Supplier="Future Electronics", Tolerance=20%, Width=0.079inch
LED1 LED2: "20mA White Diffused -40℃~+85℃ RGB SMD5050 Light Emitting Diodes (LED) ROHS", LCSC Part Number=C409780, Manufacturer=MEIHUA, Package=SMD5050, ComponentLink1Description=LCSC, ComponentLink1URL=https://www.lcsc.com/product-detail/Light-Emitting-Diodes-LED_MEIHUA-MHP5050RGBDT_C409780.html, Item Type="RGB LED", Manufacturer Part Number=MHP5050RGBDT
Q3 Q4: "20V 3.5A 750mW 61mΩ@4.5V,3.3A 1V@250uA 1PCSPChannel SOT-23 MOSFETs ROHS", LCSC Part Number=C167138, Manufacturer=WILLSEMI, Package=SOT-23, ComponentLink1Description=LCSC, ComponentLink1URL=https://www.lcsc.com/product-detail/MOSFETs_WILLSEMI-Will-Semicon-WPM2341-3-TR_C167138.html, Item Type=Mosfet, Manufacturer Part Number=WPM2341-3/TR
R1: library part AC0805FR-07100RL, "RES SMD 100 OHM 1% 1/8W 0805", LCSC Part Number=C138274, Manufacturer=Yageo, Supplier Part Number=6087312, Category="Chip SMD Resistors", ComponentLink1Description=https://datasheet.ciiva.com/12656/pyu-ac-51-rohs-l-2-12656967.pdf?src-supplier=Mouser, ComponentLink1URL=https://datasheet.ciiva.com/12656/pyu-ac-51-rohs-l-2-12656967.pdf?src-supplier=Mouser, Item Type=Resistor, Manufacturer Part Number=AC0805FR-07100RL, Pricing="5000=0.0032, 25000=0.003, 125000=0.0028, 375000=0.0027, 1000000=0.0025 (USD)", RoHS=Yes, Stock=70000, Supplier="Future Electronics"